# EAGLE board ATmga8_testBoard_v5_doubled_for_print (EAGLE 6.5.0), part 1 of 4
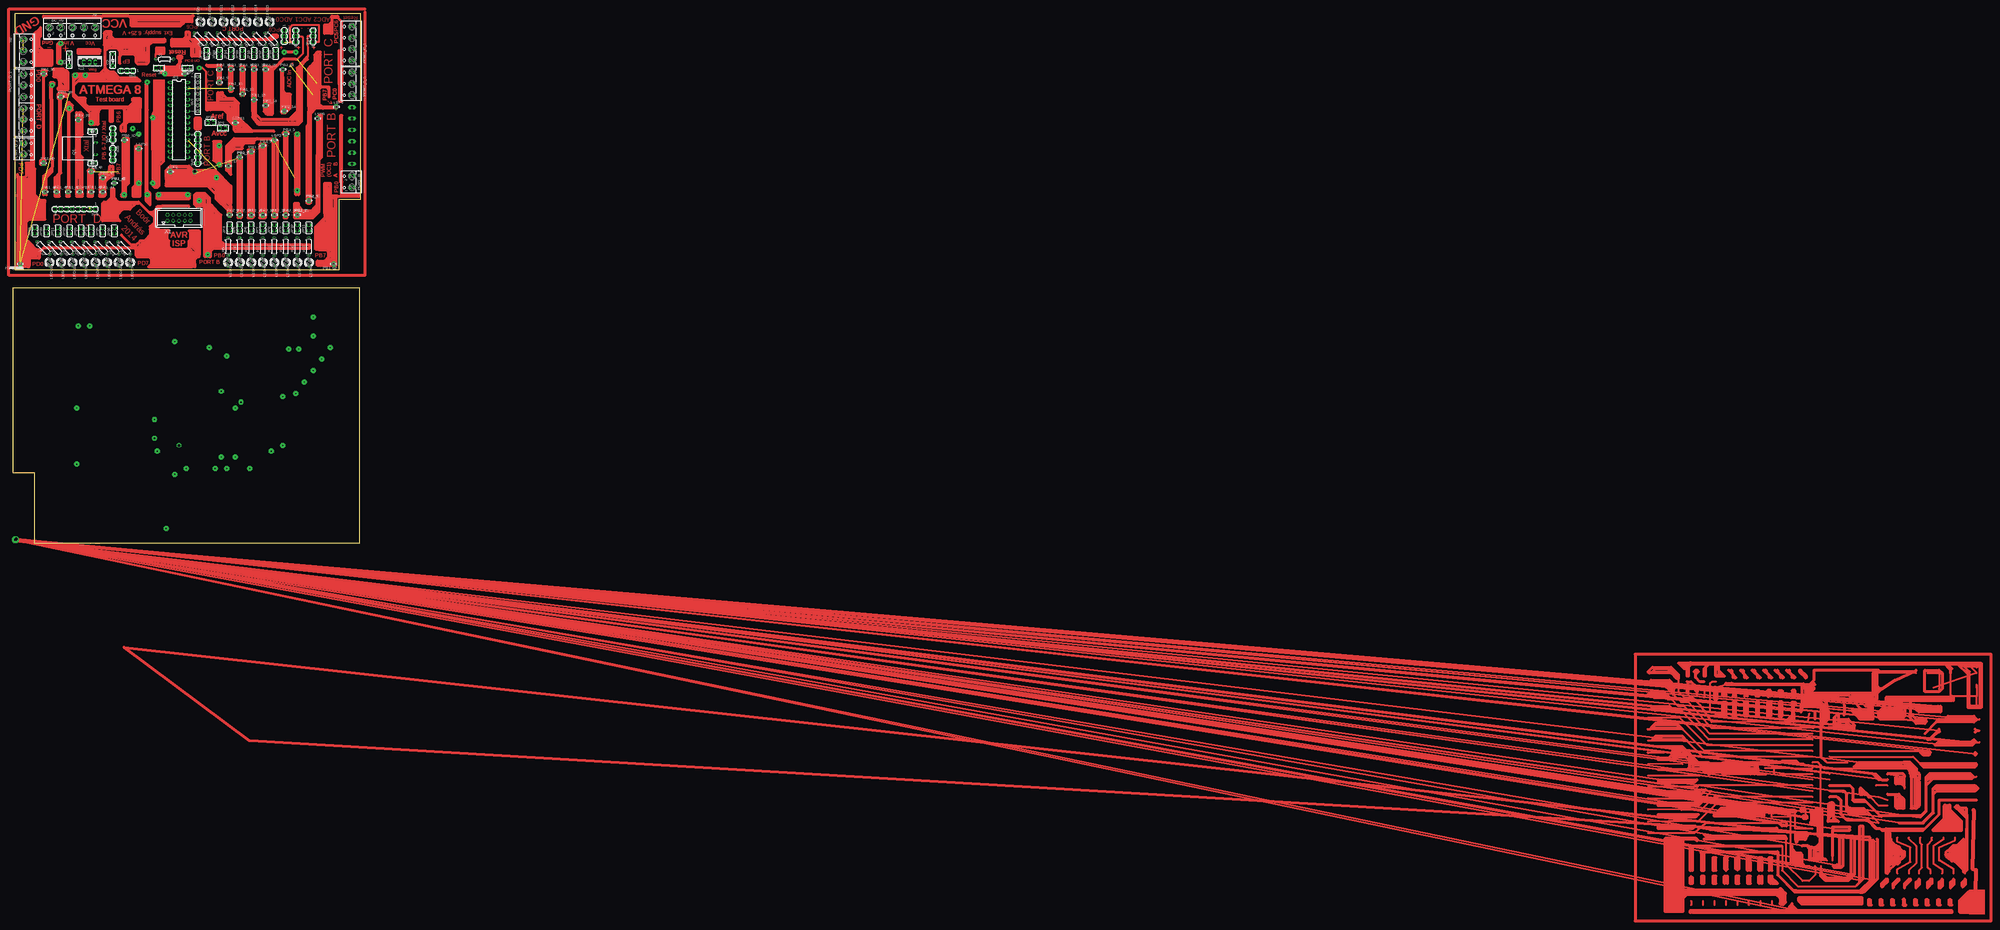
[diagram p0: board, top side]
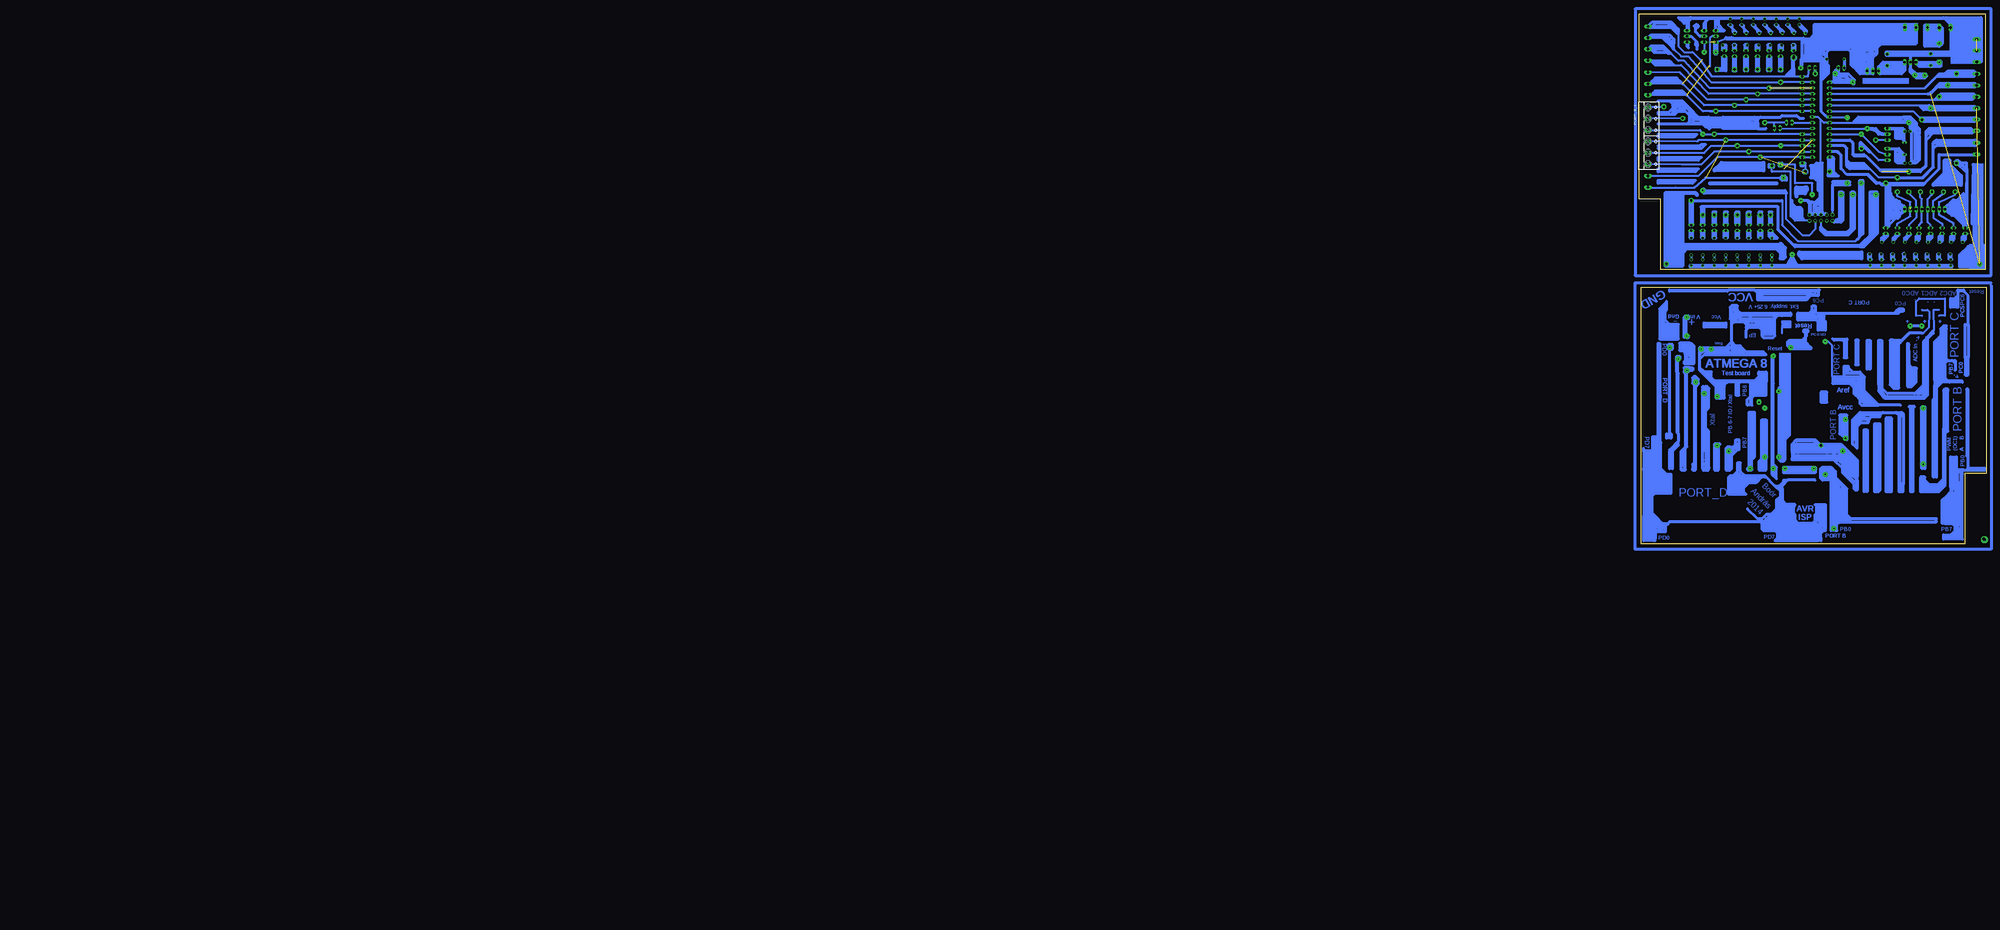
[diagram p1: board, bottom side, seen from below]

Size 153.03 x 233.35 mm. Coordinates in mm from the lower left corner, seen from the top.
Outline: 0.64,120.65 143.51,120.65 143.51,151.77 153.03,151.77 153.01,233.35 0.64,233.35 0.64,120.65
Outline: 152.4,0 9.53,0 9.53,31.12 0,31.12 0.02,112.7 152.4,112.7 152.4,0
Copper layers (1*16): Top 0.035mm / dielectric 1.5mm / Bottom 0.035mm
Design rules "default": minimum track width 10mil, minimum drill 24mil, track to track 8mil, track to pad 8mil, pad to pad 8mil, via to via 8mil, smd to smd 8mil, copper to edge 40mil, drill to drill 8mil, minimum pad ring 10mil, minimum via ring 8mil, stop-mask expansion 4mil, vias tented up to drill 0mil, thermal gap 10mil

## Footprints (pad centres in the part's own frame; a part is rotated, then mirrored left to right if it is on the bottom)
C5B2.5 = drill 0.813 pad 1.6 octagon: 1 -2.54,0; 2 2.54,0
C025-024X044 = drill 0.813 octagon: 1 -1.27,0; 2 1.27,0
W237-102 = drill 1.194 long: 1 -2.5,-1.27; 2 2.5,-1.27
DIL28-3 = drill 0.813 long: 1 -16.51,-3.81; 2 -13.97,-3.81; 3 -11.43,-3.81; 4 -8.89,-3.81; 5 -6.35,-3.81; 6 -3.81,-3.81; 7 -1.27,-3.81; 8 1.27,-3.81; 9 3.81,-3.81; 10 6.35,-3.81; 11 8.89,-3.81; 12 11.43,-3.81; 13 13.97,-3.81; 14 16.51,-3.81; 15 16.51,3.81; 16 13.97,3.81; 17 11.43,3.81; 18 8.89,3.81; 19 6.35,3.81; 20 3.81,3.81; 21 1.27,3.81; 22 -1.27,3.81; 23 -3.81,3.81; 24 -6.35,3.81; 25 -8.89,3.81; 26 -11.43,3.81; 27 -13.97,3.81; 28 -16.51,3.81
78XXS = drill 1.016 long: GND 0,-2.54; IN -2.54,-2.54; OUT 2.54,-2.54
JP1 = drill 0.914 long: 1 0,-1.27; 2 0,1.27
LED3MM = drill 0.813 octagon: A -1.27,0; K 1.27,0
LSP10 = drill 1.016 pad 2.159 octagon: MP 0,0
W237-6 = drill 1.194 long: 1 -12.5,-1.27; 2 -7.5,-1.27; 3 -2.5,-1.27; 4 2.5,-1.27; 5 7.5,-1.27; 6 12.5,-1.27
W237-4 = drill 1.194 long: 1 -7.5,-1.27; 2 -2.5,-1.27; 3 2.5,-1.27; 4 7.5,-1.27
W237-103 = drill 1.194 long: 1 -5,-1.29; 2 0,-1.29; 3 5,-1.29
Q = drill 0.61 long: 1 -2.54,-7.62; 2 2.54,-7.62
0204/7 = drill 0.813 octagon: 1 -3.81,0; 2 3.81,0
0207/7 = drill 0.813 octagon: 1 -3.81,0; 2 3.81,0
MA03-1 = drill 1.016 long: 1 -2.54,0; 2 0,0; 3 2.54,0
FE07 = drill 0.813 long: 1 -7.62,0; 2 -5.08,0; 3 -2.54,0; 4 0,0; 5 2.54,0; 6 5.08,0; 7 7.62,0
MA06-1 = drill 1.016 long: 1 -6.35,0; 2 -3.81,0; 3 -1.27,0; 4 1.27,0; 5 3.81,0; 6 6.35,0
MA08-1 = drill 1.016 long: 1 -8.89,0; 2 -6.35,0; 3 -3.81,0; 4 -1.27,0; 5 1.27,0; 6 3.81,0; 7 6.35,0; 8 8.89,0
057-010-1 = drill 1 octagon: 1 -5.08,-1.27; 2 -5.08,1.27; 3 -2.54,-1.27; 4 -2.54,1.27; 5 0,-1.27; 6 0,1.27; 7 2.54,-1.27; 8 2.54,1.27; 9 5.08,-1.27; 10 5.08,1.27

## Placement (x,y rotation side)
C1  0.33_uF  [C5B2.5]  24.69,213.22 90 top
C2  0.33_uF  [C5B2.5]  43.81,213.11 90 top
C3  [C025-024X044]  34.92,181.61 180 top
C4  [C025-024X044]  34.92,167.64 180 top
DC_IN  [W237-102]  18.42,226.06 180 top
IC1  ATmega8  [DIL28-3]  73.03,186.69 270 top
IC2  7805_CV  [78XXS]  33.66,214.63 0 top
JP1  PC0_Reset  [JP1]  64.14,209.55 90 top
JP2  PC0_IO  [JP1]  76.84,209.55 90 top
JP3  [JP1]  92.33,183.01 270 top
JP4  [JP1]  95.25,139.06 0 top
JP5  [JP1]  99.7,139.06 0 top
JP6  [JP1]  104.78,139.06 0 top
JP7  [JP1]  109.86,139.06 0 top
JP8  [JP1]  114.94,139.06 0 top
JP9  [JP1]  120.02,139.06 0 top
JP10  [JP1]  125.09,139.06 0 top
JP11  [JP1]  130.17,139.06 0 top
JP12  [JP1]  85.09,215.9 0 top
JP13  [JP1]  90.81,215.9 0 top
JP14  [JP1]  95.89,215.9 0 top
JP15  [JP1]  100.97,215.9 0 top
JP16  [JP1]  106.05,215.9 0 top
JP17  [JP1]  111.12,215.9 0 top
JP18  [JP1]  115.57,215.9 0 top
JP19  [JP1]  9.53,137.8 0 top
JP20  [JP1]  14.61,137.8 0 top
JP21  [JP1]  19.69,137.8 0 top
JP22  [JP1]  24.77,137.8 0 top
JP23  [JP1]  29.85,137.8 0 top
JP24  [JP1]  34.29,137.8 0 top
JP25  [JP1]  39.37,137.8 0 top
JP26  [JP1]  44.45,137.8 0 top
JP27  VREF_VCC  [JP1]  87,185.42 270 top
LED1  [LED3MM]  94.62,123.83 270 top
LED2  [LED3MM]  99.7,123.83 270 top
LED3  [LED3MM]  104.78,123.83 270 top
LED4  [LED3MM]  109.86,123.83 270 top
LED5  [LED3MM]  114.94,123.83 270 top
LED6  [LED3MM]  120.02,123.83 270 top
LED7  [LED3MM]  125.09,123.83 270 top
LED8  [LED3MM]  130.17,123.83 270 top
LED9  [LED3MM]  82.55,229.87 90 top
LED10  [LED3MM]  87.63,229.87 90 top
LED11  [LED3MM]  92.71,229.87 90 top
LED12  [LED3MM]  97.79,229.87 90 top
LED13  [LED3MM]  102.87,229.87 90 top
LED14  [LED3MM]  107.95,229.87 90 top
LED15  [LED3MM]  113.03,229.87 90 top
LED16  [LED3MM]  15.88,123.83 270 top
LED17  [LED3MM]  20.96,123.83 270 top
LED18  [LED3MM]  26.04,123.83 270 top
LED19  [LED3MM]  31.12,123.83 270 top
LED20  [LED3MM]  36.2,123.83 270 top
LED21  [LED3MM]  41.27,123.83 270 top
LED22  [LED3MM]  46.35,123.83 270 top
LED23  [LED3MM]  51.43,123.83 270 top
LSP1  LSP10  [LSP10]  69.22,163.83 0 top
LSP2  LSP10  [LSP10]  114.94,177.8 0 top
LSP3  LSP10  [LSP10]  3.17,123.19 180 top
LSP4  LSP10  [LSP10]  3.17,123.19 180 top
LSP5  LSP10  [LSP10]  142.24,192.41 0 top
LSP6  LSP10  [LSP10]  133.98,187.32 0 top
LSP7  LSP10  [LSP10]  3.17,123.19 180 top
LSP8  LSP10  [LSP10]  3.17,123.19 180 top
LSP9  LSP10  [LSP10]  75.57,207.01 0 top
LSP10  LSP10  [LSP10]  55.24,173.99 0 top
LSP11  LSP10  [LSP10]  97.79,185.42 0 top
LSP12  LSP10  [LSP10]  3.17,123.19 180 top
LSP13  LSP10  [LSP10]  3.17,123.19 180 top
LSP14  LSP10  [LSP10]  3.17,123.19 180 top
LSP15  LSP10  [LSP10]  3.17,123.19 180 top
LSP16  LSP10  [LSP10]  29.21,154.94 0 top
LSP17  LSP10  [LSP10]  94.62,166.37 0 top
LSP18  LSP10  [LSP10]  3.17,123.19 180 top
LSP19  LSP10  [LSP10]  3.17,123.19 180 top
PB1_1  LSP10  [LSP10]  130.17,151.13 0 top
PB1_2  LSP10  [LSP10]  125.09,144.78 0 top
PB1_3  LSP10  [LSP10]  120.02,180.34 0 top
PB1_5  LSP10  [LSP10]  109.86,175.26 0 top
PB1_6  LSP10  [LSP10]  104.78,172.72 0 top
PB1_7  LSP10  [LSP10]  99.7,170.18 0 top
PB1_8  LSP10  [LSP10]  99.7,170.18 0 top
PB1_9  LSP10  [LSP10]  90.81,203.2 0 top
PB1_10  LSP10  [LSP10]  95.89,200.66 0 top
PB1_11  LSP10  [LSP10]  100.97,198.12 0 top
PB1_12  LSP10  [LSP10]  106.05,195.58 0 top
PB1_13  LSP10  [LSP10]  111.12,193.04 0 top
PB1_14  LSP10  [LSP10]  119.38,190.5 0 top
PB1_15  LSP10  [LSP10]  85.09,214 0 top
PB1_16  LSP10  [LSP10]  90.81,208.92 0 top
PB1_17  LSP10  [LSP10]  95.89,208.92 0 top
PB1_18  LSP10  [LSP10]  100.97,208.92 0 top
PB1_19  LSP10  [LSP10]  106.05,208.92 0 top
PB1_20  LSP10  [LSP10]  111.12,208.92 0 top
PB1_21  LSP10  [LSP10]  118.75,208.92 0 top
PB1_22  LSP10  [LSP10]  3.17,123.19 180 top
PB1_23  LSP10  [LSP10]  3.17,123.19 180 top
PB1_24  LSP10  [LSP10]  3.17,123.19 180 top
PB1_25  LSP10  [LSP10]  3.17,123.19 180 top
PB1_26  LSP10  [LSP10]  3.17,123.19 180 top
PB1_27  LSP10  [LSP10]  3.17,123.19 180 top
PB1_28  LSP10  [LSP10]  3.17,123.19 180 top
PB1_29  LSP10  [LSP10]  3.17,123.19 180 top
PB1_30  LSP10  [LSP10]  3.17,123.19 180 top
PB1_31  LSP10  [LSP10]  3.17,123.19 180 top
PB1_32  LSP10  [LSP10]  3.17,123.19 180 top
PB1_33  LSP10  [LSP10]  3.17,123.19 180 top
PB1_34  LSP10  [LSP10]  3.17,123.19 180 top
PB1_35  LSP10  [LSP10]  3.17,123.19 180 top
PB1_36  LSP10  [LSP10]  13.33,207.01 0 top
PB1_37  LSP10  [LSP10]  3.17,123.19 180 top
PB1_38  LSP10  [LSP10]  20.96,196.85 0 top
PB1_39  LSP10  [LSP10]  28.58,186.69 0 top
PB1_40  LSP10  [LSP10]  34.29,163.83 0 top
PB1_41  LSP10  [LSP10]  39.37,161.29 0 top
PB1_42  LSP10  [LSP10]  44.45,158.75 0 top
PB1_43  LSP10  [LSP10]  44.45,158.75 0 top
PB1_44  LSP10  [LSP10]  39.37,154.94 0 top
PB1_45  LSP10  [LSP10]  34.29,154.94 0 top
PB1_46  LSP10  [LSP10]  24.13,154.94 0 top
PB1_47  LSP10  [LSP10]  19.05,154.94 0 top
PB1_48  LSP10  [LSP10]  13.97,154.94 0 top
PB1_49  LSP10  [LSP10]  13.33,167.64 0 top
PB1_50  LSP10  [LSP10]  3.17,123.19 180 top
PB1_51  LSP10  [LSP10]  3.17,123.19 180 top
PB1_52  LSP10  [LSP10]  3.17,123.19 180 top
PB1_53  LSP10  [LSP10]  3.17,123.19 180 top
PB1_54  LSP10  [LSP10]  3.17,123.19 180 top
PB1_55  LSP10  [LSP10]  3.17,123.19 180 top
PB1_56  LSP10  [LSP10]  3.17,123.19 180 top
PB1_57  LSP10  [LSP10]  3.17,123.19 180 top
PB1_58  LSP10  [LSP10]  3.17,123.19 180 top
PB1_59  LSP10  [LSP10]  3.17,123.19 180 top
PB1_60  LSP10  [LSP10]  3.17,123.19 180 top
PB1_61  LSP10  [LSP10]  3.17,123.19 180 top
PB1_62  LSP10  [LSP10]  141.1,123.19 180 top
PB2_1  LSP10  [LSP10]  3.17,123.19 180 top
PB2_2  LSP10  [LSP10]  3.17,123.19 180 top
PB2_3  LSP10  [LSP10]  3.17,123.19 180 top
PB2_4  LSP10  [LSP10]  3.17,123.19 180 top
PB2_5  LSP10  [LSP10]  3.17,123.19 180 top
PB2_6  LSP10  [LSP10]  3.17,123.19 180 top
PB2_7  LSP10  [LSP10]  3.17,123.19 180 top
PB2_8  LSP10  [LSP10]  3.17,123.19 180 top
PB2_9  LSP10  [LSP10]  95.25,144.78 0 top
PB2_10  LSP10  [LSP10]  99.7,144.78 0 top
PB2_11  LSP10  [LSP10]  104.78,144.78 0 top
PB2_12  LSP10  [LSP10]  109.86,144.78 0 top
PB2_13  LSP10  [LSP10]  114.94,144.78 0 top
PB2_14  LSP10  [LSP10]  120.02,144.78 0 top
PB2_15  LSP10  [LSP10]  125.09,144.78 0 top
PB2_16  LSP10  [LSP10]  130.17,151.13 0 top
PB2_17  LSP10  [LSP10]  3.17,123.19 180 top
PB2_18  LSP10  [LSP10]  3.17,123.19 180 top
PB2_19  LSP10  [LSP10]  3.17,123.19 180 top
PB2_20  LSP10  [LSP10]  3.17,123.19 180 top
PB2_21  LSP10  [LSP10]  3.17,123.19 180 top
PB2_22  LSP10  [LSP10]  3.17,123.19 180 top
PB2_23  LSP10  [LSP10]  3.17,123.19 180 top
PB6_IO_1  LSP10  [LSP10]  48.89,177.8 0 top
PB6_IO_2  LSP10  [LSP10]  3.17,123.19 180 top
PORT_B_1  [W237-6]  147.95,179.71 270 bottom
PORT_B_2  [W237-102]  147.95,159.38 90 top
PORT_C_1  [W237-4]  147.95,220.34 90 top
PORT_C_2  [W237-103]  147.95,202.56 90 top
PORT_D_1  PORT_D  [W237-6]  5.71,194.31 270 top
PORT_D_2  [W237-102]  5.74,173.91 270 top
Q1  [Q]  28.58,173.99 90 top
R1  10k  [0204/7]  66.68,213.36 0 top
R2  470R  [0207/7]  82.55,222.25 135 top
R3  470R  [0207/7]  87.63,222.25 135 top
R4  470R  [0207/7]  92.71,222.25 135 top
R5  470R  [0207/7]  97.79,222.25 135 top
R6  470R  [0207/7]  102.87,222.25 135 top
R7  470R  [0207/7]  108.59,222.25 135 top
R8  470R  [0207/7]  113.67,222.25 135 top
R9  470R  [0207/7]  94.62,130.81 90 top
R10  470R  [0207/7]  99.7,130.81 90 top
R11  470R  [0207/7]  104.78,130.81 90 top
R12  470R  [0207/7]  109.86,130.81 90 top
R13  470R  [0207/7]  114.94,130.81 90 top
R14  470R  [0207/7]  120.02,130.81 90 top
R15  470R  [0207/7]  130.17,130.81 90 top
R16  470R  [0207/7]  125.09,130.81 90 top
R17  470R  [0207/7]  13.33,130.18 135 top
R18  470R  [0207/7]  18.42,130.18 135 top
R19  470R  [0207/7]  23.5,130.18 135 top
R20  470R  [0207/7]  28.58,130.18 135 top
R21  470R  [0207/7]  33.66,130.18 135 top
R22  470R  [0207/7]  38.73,130.18 135 top
R23  470R  [0207/7]  48.89,130.18 135 top
R24  470R  [0207/7]  43.81,130.18 135 top
SV1  Power  [MA03-1]  50.16,208.28 180 top
SV2  Pot 1  [MA03-1]  119.38,223.52 270 top
SV3  Pot 2  [MA03-1]  124.46,223.52 90 top
SV4  Pot 3  [MA03-1]  132.08,223.52 90 top
SV5  Xtal/PB6  [MA03-1]  43.81,180.34 90 top
SV6  Xtal/PB7  [MA03-1]  43.81,171.45 270 top
SV7  [FE07]  81.28,198.12 90 top
SV8  [MA06-1]  81.28,173.99 90 top
SV9  [MA08-1]  27.31,147.32 180 top
X1  057-010-1  [057-010-1]  73.03,143.51 0 top
X8  VCC_out  [W237-103]  31.12,226.06 180 top
X9  GND_out  [W237-103]  5.71,217.17 270 top

## Library data of the parts
C1 C2 = capacitor-wima
C3 C4 R2-R24 = rcl
DC_IN PORT_B_2 PORT_D_2 = con-wago-500; MPN: 237-102; OC_FARNELL: unknown; OC_NEWARK: 70K9898
IC1 = ic-package
IC2 = v-reg
JP1-JP27 = jumper
LED1-LED23 = led
LSP1-LSP19 PB1_1-PB1_3 PB1_5-PB1_62 PB2_1-PB2_23 PB6_IO_1 PB6_IO_2 = solpad
PORT_B_1 PORT_C_1 PORT_D_1 = con-wago-500; OC_FARNELL: unknown; OC_NEWARK: unknown
PORT_C_2 X8 X9 = con-wago-500; MPN: 237-103; OC_FARNELL: unknown; OC_NEWARK: 18M7116
Q1 = special
R1 = resistor
SV1-SV6 SV8 SV9 = con-lstb; OC_FARNELL: unknown; OC_NEWARK: unknown
SV7 = con-lsta; OC_FARNELL: unknown; OC_NEWARK: unknown
X1 = con-panduit; OC_FARNELL: unknown; OC_NEWARK: unknown

## Nets
AVCC: IC1.19 PB1_3.MP PORT_B_1.3 SV8.6 X1.7
N$1: C2.1 IC2.OUT SV1.3
N$2: C1.1 DC_IN.1 IC2.IN X8.3
N$3: IC1.1 JP1.1 JP2.2 LSP9.MP X1.5
N$5: IC1.14 LSP1.MP
N$6: LSP3.MP LSP4.MP
N$8: PB1_22.MP PB2_1.MP
N$9: PB1_23.MP PB2_2.MP
N$10: PB1_24.MP PB2_3.MP
N$11: LSP13.MP PB2_4.MP
N$12: LSP8.MP PB6_IO_2.MP
N$13: IC1.20 JP3.1
N$14: LSP7.MP LSP12.MP
N$15: IC1.23 PB1_14.MP PORT_C_2.1 SV2.2
N$16: IC1.24 PB1_13.MP PORT_C_2.2 SV3.2
N$18: IC1.26 PB1_11.MP PORT_C_1.1
N$19: IC1.27 PB1_10.MP PORT_C_1.2
N$20: IC1.28 PB1_9.MP PORT_C_1.3
N$21: JP2.1 PORT_C_1.4
N$22: JP1.2 R1.1
N$23: PB1_25.MP PB2_5.MP
N$24: PB1_26.MP PB2_6.MP
N$25: IC1.10 SV6.2
N$26: IC1.9 SV5.2
N$27: IC1.2 PB1_36.MP PORT_D_1.1
N$28: IC1.3 PB1_37.MP PORT_D_1.2
N$29: IC1.4 PB1_38.MP PORT_D_1.3
N$30: IC1.5 LSP15.MP PORT_D_1.4
N$31: IC1.6 PB1_39.MP PORT_D_1.5
N$32: PB1_28.MP PB2_8.MP
N$33: C4.1 Q1.1 SV6.1
N$34: C3.1 Q1.2 SV5.3
N$35: LSP10.MP SV6.3
N$36: PB6_IO_1.MP SV5.1
N$37: IC1.11 PB1_40.MP PORT_D_1.6
N$38: IC1.12 PB1_41.MP PORT_D_2.1
N$39: IC1.13 PB1_42.MP PORT_D_2.2
N$40: IC1.18 LSP17.MP PORT_B_1.4 SV8.5 X1.9
N$41: IC1.17 PB1_5.MP PORT_B_1.5 SV8.4 X1.1
N$42: IC1.16 PB1_6.MP PORT_B_1.6 SV8.3
N$43: IC1.15 PB1_7.MP PORT_B_2.1 SV8.2
N$44: LSP2.MP PB1_8.MP PORT_B_2.2 SV8.1
N$45: PB1_27.MP PB2_7.MP
N$46: IC1.21 JP27.1
N$47: JP4.1 R9.2
N$48: JP5.1 R10.2
N$49: JP6.1 R11.2
N$50: JP7.1 R12.2
N$51: JP13.1 PB1_16.MP
N$52: JP9.1 R14.2
N$53: JP11.1 R15.2
N$54: JP10.1 R16.2
N$55: LED9.A R2.2
N$56: JP14.1 PB1_17.MP
N$58: JP15.1 PB1_18.MP
N$59: JP17.2 R7.1
N$60: JP17.1 PB1_20.MP
N$61: JP18.1 PB1_21.MP
N$62: JP12.2 R2.1
N$65: JP14.2 R4.1
N$66: JP16.2 R6.1
N$67: JP13.2 R3.1
N$68: JP18.2 R8.1
N$69: LED1.A R9.1
N$70: LED2.A R10.1
N$71: LED3.A R11.1
N$72: LED4.A R12.1
N$73: LED5.A R13.1
N$74: LED7.A R16.1
N$75: LED6.A R14.1
N$76: LED8.A R15.1
N$78: LED10.A R3.2
N$79: LED11.A R4.2
N$80: LED12.A R5.2
N$81: LED13.A R6.2
N$82: LED14.A R7.2
N$83: LED15.A R8.2
N$84: JP4.2 PB2_9.MP
N$85: JP5.2 PB2_10.MP
N$87: JP7.2 PB2_12.MP
N$88: JP8.2 PB2_13.MP
N$89: JP9.2 PB2_14.MP
N$90: JP10.2 PB2_15.MP
N$92: PB1_35.MP PB1_50.MP
N$93: PB1_34.MP PB1_51.MP
N$94: PB1_33.MP PB1_52.MP
N$95: LSP18.MP PB1_32.MP
N$96: LSP14.MP PB1_53.MP
N$97: PB1_31.MP PB1_54.MP
N$98: PB1_30.MP PB1_55.MP
N$99: PB1_29.MP PB1_56.MP
N$100: JP19.1 R17.2
N$101: JP20.1 R18.2
N$102: JP21.1 R19.2
N$104: JP23.1 R21.2
N$105: JP24.1 R22.2
N$107: JP25.1 R24.2
N$108: LED16.A R17.1
N$109: LED17.A R18.1
N$110: LED18.A R19.1
N$111: LED19.A R20.1
N$112: LED20.A R21.1
N$113: LED22.A R24.1
N$114: LED21.A R22.1
N$115: LED23.A R23.1
N$117: JP20.2 PB1_48.MP SV9.7
N$118: JP21.2 PB1_47.MP SV9.6
N$119: JP22.2 PB1_46.MP SV9.5
N$121: JP24.2 PB1_45.MP SV9.3
N$122: JP25.2 PB1_44.MP SV9.2
N$123: JP26.2 PB1_43.MP SV9.1
N$124: PB1_57.MP PB2_17.MP
N$125: PB1_58.MP PB2_18.MP
N$126: LSP19.MP PB2_19.MP
N$127: PB1_59.MP PB2_20.MP
N$128: PB1_60.MP PB2_21.MP
N$129: PB1_61.MP PB2_22.MP
N$130: PB1_62.MP PB2_23.MP
N$137: X9.1 X9.2 X9.3
N$139: C1.2 C2.2 C3.2 C4.2 DC_IN.2 IC1.8 IC1.22 IC2.GND LED1.K LED2.K LED3.K LED4.K LED5.K LED6.K LED7.K LED8.K LED9.K LED10.K LED11.K LED12.K LED13.K LED14.K LED15.K LED16.K LED17.K LED18.K LED19.K LED20.K LED21.K LED22.K LED23.K SV2.1 SV3.3 SV4.3 X1.4 X1.6 X1.8 X1.10
N$152: SV1.1 X1.2
N$161: JP23.2 LSP16.MP SV9.4
N$163: IC1.25 PB1_12.MP PORT_C_2.3 SV4.2
N$168: JP8.1 R13.2
N$173: JP16.1 PB1_19.MP
N$174: JP11.2 PB2_16.MP
N$177: JP15.2 R5.1
N$178: JP12.1 PB1_15.MP
N$186: JP6.2 PB2_11.MP
N$187: LSP6.MP PB1_2.MP PORT_B_1.2
N$188: JP26.1 R23.2
N$189: JP22.1 R20.2
N$209: JP19.2 PB1_49.MP SV9.8
N$216: LSP5.MP PB1_1.MP PORT_B_1.1
VCC: IC1.7 JP3.2 JP27.2 LSP11.MP R1.2 SV1.2 SV2.3 SV3.1 SV4.1 X8.1 X8.2

## Tracks (layer width: path | path; a pad name or v marks a point on that pad's centre or on a via)
AVCC  (via drill 0.5 pad 2.18)
  Top 0.813: v125.09,155.57 v125.09,180.34
  Bottom 0.813: PORT_B_1.3 126.41,182.21 v125.09,180.34 PB1_3.MP SV8.6 IC1.19 | X1.7 75.57,138.43 78.23,135.76 81.15,135.76 88.27,142.88 88.27,154.31 | 88.9,155.57 v125.09,155.57
  Bottom 1.422: 124.46,156.21 123.83,155.57 88.9,155.57 88.27,154.31 124.46,154.31 125.09,154.94 125.09,156.21 124.46,156.21
AVCC1  (via drill 0.5 pad 2.18)
  Top 0.813: 720.09,-102.28 742.91,-102.28 v0.64,1.27 792.48,-104.14 | 793.75,-142.24 793.75,-146.05 791.08,-148.72 788.16,-148.72 781.05,-141.6 781.05,-130.17 | 749.3,-128.91 v1.27,1.91
  Top 1.422: 749.3,-128.91 745.49,-128.91 744.86,-128.27 749.3,-128.91 | 749.3,-128.91 780.41,-128.91 781.05,-130.17 749.3,-130.17 | 744.86,-130.17 749.3,-130.17 | 749.3,-130.17 749.3,-128.91
AVCC2  (via drill 0.5 pad 2.18)
  Bottom 0.813: v27.94,34.93 v27.94,59.69
N$1
  Bottom 0.813: IC2.OUT C2.1 43.81,208.28 SV1.3
  Bottom 1.422: IC2.OUT 36.2,208.28 37.46,207.01 46.99,207.01 47.62,207.65 47.62,210.19 45.72,212.09 IC2.OUT | IC2.OUT 36.2,209.55 37.46,208.28 46.35,208.28 46.99,207.65 46.99,209.55 45.09,211.46 38.1,211.46 37.46,210.82 | 37.46,210.82 37.46,211.46 | 37.46,210.82 37.46,209.55 46.35,209.55 45.09,210.82 38.1,210.82
N$2  (via drill 0.5 pad 2.18)  (1 unrouted)
  Top 0.813: v20.96,212.09 20.96,219.71 20.96,220.34
  Top 1.422: 21.59,212.09 20.32,213.36 | 20.32,213.36 20.32,220.34 | 20.32,213.36 20.32,212.09 20.96,211.46 | 20.96,211.46 21.59,211.46 | 20.96,211.46 19.69,211.46 19.69,220.34 20.32,220.98 21.59,220.98 21.59,219.71 20.96,219.71
  Bottom 0.813: IC2.IN C1.1 v20.96,212.09 | 20.96,220.34 21,220.38 DC_IN.1 20.92,227.35 X8.3
  Bottom 1.422: 20.32,212.09 20.32,211.46 | 20.32,211.46 20.32,210.19 29.85,210.19 31.12,211.46 IC2.IN 21.59,212.09 | 21.59,212.09 20.32,212.09 | 20.32,212.09 20.96,211.46 | 20.96,211.46 21.59,210.82 29.21,210.82 29.85,211.46 20.96,211.46 | 20.96,211.46 v20.96,212.09 | v20.96,212.09 21.59,212.73 | 21.59,212.73 20.32,212.73 20.32,212.09 | 20.32,211.46 v20.96,212.09 | 21.59,212.73 21.59,212.09
N$3  (via drill 0.5 pad 2.18)
  Top 0.813: JP1.1 65.41,208.28 66.68,207.01 67.31,207.01 LSP9.MP | 59.05,191.13 59.05,155.57 v59.05,153.67
  Top 1.27: 73.03,211.46 71.12,209.55 | 72.39,210.82 73.66,212.09 73.66,212.73 | 73.66,213.36 74.3,214 74.3,214.63 72.39,214.63 72.39,214 73.66,212.73 | 73.66,212.73 73.66,213.36 | 73.66,213.36 73.03,214 73.03,209.55 73.03,208.92
  Top 1.422: 59.05,191.13 v59.05,203.2 58.42,202.56 58.42,154.31 v59.05,153.67 | JP1.1 66.04,210.19 72.39,210.19 73.03,209.55 LSP9.MP 75.57,206.38 66.68,206.38 65.41,207.65 JP1.1 | JP1.1 71.12,209.55 71.76,209.55 73.66,207.65 67.95,207.65 67.31,208.28 | 67.31,208.28 66.68,208.92 66.04,208.28 67.31,207.01 69.85,207.01 71.76,208.92 67.95,208.92 67.31,208.28 | 58.42,153.67 58.42,151.13 60.32,149.22 60.32,154.31 59.05,155.57 59.05,151.13 | 59.05,151.13 59.05,150.5 59.69,149.86 59.69,150.5 59.05,151.13
  Bottom 0.813: IC1.1 67.95,203.2 | 67.95,203.2 67.31,203.84 66.68,204.47 66.68,207.01 65.41,207.01 JP1.1 | LSP9.MP JP2.2 | X1.5 73.03,139.7 73.03,138.43 70.48,135.89 61.59,135.89 59.05,138.43 v59.05,153.67 | v59.05,203.2 67.31,203.2 67.95,203.2
  Bottom 1.422: v59.05,203.2 59.05,203.84 | 59.69,203.84 66.68,203.84 66.68,208.28 JP1.1 | JP1.1 65.41,204.47 66.04,205.11 66.04,204.47 67.31,203.2 | 67.31,203.2 69.85,203.2 | 67.31,203.2 59.69,203.2 59.05,202.56 58.42,202.56 58.42,203.84 | 58.42,203.84 59.05,203.84 | JP1.1 67.31,207.65 67.31,203.84 | 64.77,207.01 60.96,207.01 58.42,204.47 58.42,203.84 | 59.05,203.84 59.69,203.84 | 59.69,203.84 61.59,205.74 64.14,205.74 64.77,206.38 64.77,205.11 64.14,204.47 62.23,204.47 61.59,205.11 | LSP9.MP 75.57,210.19 | 58.42,154.94 58.42,138.43 60.96,135.89 61.59,135.89 71.12,135.89 73.03,137.8 73.03,139.7 70.48,137.16 61.59,137.16 59.69,139.06 59.69,154.94 58.42,154.94
N$4
  Top 1.422: 111.12,175.9 108.59,175.9 108.59,143.51 111.12,143.51 111.12,175.9 | 111.12,175.9 110.49,174.62 110.49,143.51 109.22,143.51 109.22,175.26
N$5  (via drill 1.3)
  Top 0.813: LSP1.MP v80.01,163.83 88.27,163.83 89.54,162.56 89.54,158.12 | 89.54,153.67 89.54,152.4 93.34,152.4 95.25,152.4 95.25,147.96 95.25,145.42
  Top 1.422: 95.25,147.96 94.62,147.96 90.81,151.77 93.34,151.77 93.34,151.13 95.89,148.59 | 95.89,144.15 95.25,144.15 94.62,144.78 94.62,146.69 89.54,151.77 89.54,153.67 | 89.54,153.67 89.54,158.12 | 89.54,158.12 89.54,160.02 88.9,160.66 85.09,160.66 | 82.55,160.66 69.85,160.66 67.95,162.56 67.95,163.83 68.58,164.47 | 68.58,164.47 78.11,164.47 | 79.38,164.47 88.9,164.47 95.89,157.48 95.89,149.86 | 95.89,148.59 95.89,144.78 | 95.89,148.59 95.89,149.86 | 95.89,149.86 93.34,152.4 | 90.17,155.57 85.09,160.66 | 85.09,160.66 82.55,160.66 | 82.55,160.66 81.28,161.93 67.95,161.93 67.31,161.29 | 67.31,161.29 67.31,160.66 | 67.31,160.66 67.31,158.75 67.31,158.12 | 67.31,158.12 85.09,158.12 | 86.36,158.12 89.54,158.12 | 89.54,158.12 88.27,159.38 | 88.27,159.38 88.27,160.02 87.63,160.66 67.31,160.66 | 67.31,160.66 67.95,160.02 67.95,158.75 68.58,159.38 88.27,159.38 | 67.31,161.29 67.31,164.47 | 67.31,164.47 68.58,164.47 | 67.31,164.47 69.22,166.37 77.47,166.37 79.38,164.47 | 79.38,164.47 78.11,164.47 | 78.11,164.47 76.84,165.74 69.22,165.74 | 89.54,153.67 85.73,157.48 | 85.73,157.48 85.09,158.12 | 85.09,158.12 86.36,158.12 | 86.36,158.12 87,157.48 87.63,157.48 90.17,154.94 | 85.73,157.48 67.31,157.48 67.31,158.12
  Bottom 0.813: IC1.14 LSP1.MP
  Bottom 1.422: LSP1.MP 68.58,164.47 68.58,169.55 69.85,169.55 69.85,162.56 | 69.85,162.56 67.95,162.56 67.31,163.19 67.31,163.83 | 67.31,163.83 67.31,169.55 67.95,170.18 68.58,170.18 | 67.31,163.83 65.41,161.93 69.85,161.93 69.85,162.56 | v80.01,163.83 79.38,163.83 80.01,163.19 | 80.01,163.19 80.65,163.19 80.65,164.47 79.38,164.47 79.38,163.19 80.01,163.19
N$6  (1 unrouted)
N$7
  Top 1.422: 42.54,191.13 42.54,186.06 43.81,186.06 43.81,191.13
N$8  (1 unrouted)
N$9  (1 unrouted)
N$10  (1 unrouted)
N$11  (1 unrouted)
N$12  (1 unrouted)
N$13
  Bottom 0.813: JP3.1 IC1.20
N$14  (1 unrouted)
N$15  (2 unrouted)
  Bottom 0.813: PB1_14.MP 125.09,190.5 132.08,197.49 149.25,197.49 PORT_C_2.1 | SV2.2 121.03,223.52 121.92,222.63 121.92,210.19 | IC1.23 PB1_14.MP | 121.92,190.5 PB1_14.MP
  Bottom 1.422: 132.08,197.49 133.98,199.39 146.05,199.39 147.32,198.12 133.98,198.12
N$16  (1 unrouted)
  Top 0.813: SV3.2 127,223.52 127.64,222.88 127.58,215.85 125.09,213.36 124.46,213.36 119.38,213.36 114.94,208.92 114.3,208.92 | 113.03,208.92 111.12,208.92
  Top 1.422: 111.76,189.23 110.49,190.5 110.49,210.19 111.76,210.19 | 111.76,189.23 111.76,210.19 | 111.76,210.19 115.57,210.19 | 115.57,210.19 118.75,213.36 124.46,213.36 | 115.57,210.19 114.94,209.55 | 111.76,189.23 114.3,189.23 114.3,208.92 113.03,208.92 113.03,189.87 112.4,190.5 112.4,208.28
  Bottom 0.813: 149.41,202.63 133.98,202.62 124.46,193.04 PB1_13.MP IC1.24 | 149.41,202.63 147.95,202.56 PORT_C_2.2 149.54,202.56 149.41,202.63
  Bottom 1.422: SV3.2 126.37,223.52 128.27,225.43 128.27,227.33 | 128.27,227.33 127.64,227.33 127,227.97 127.64,228.6 128.27,228.6 128.91,227.97 128.27,227.33
N$17
  Top 1.422: 114.3,209.55 112.4,209.55
N$18
  Bottom 0.813: 144.26,212.84 139.69,212.84 | 139.69,212.84 137.79,210.82 134.62,210.82 122.56,198.12 PB1_11.MP IC1.26 | PORT_C_1.1 144.26,212.84 | 144.26,212.84 144.14,212.84 139.69,212.84
  Bottom 1.422: 138.43,210.82 146.05,210.82 147.95,212.73 139.7,212.73 137.79,210.82 139.06,210.82 140.33,212.09 142.24,212.09 144.14,212.09 146.05,212.09
N$19  (1 unrouted)
  Bottom 0.813: 140.97,217.99 140.33,217.17 139.06,215.9 135.89,212.73 133.35,212.73 131.44,210.82 121.92,200.66 IC1.27 | 140.97,217.99 PORT_C_1.2 | 140.97,217.99 149.44,218
  Bottom 1.422: 140.33,216.54 139.7,216.54 | 139.7,216.54 139.06,215.9 | 139.7,216.54 142.24,219.07 147.95,219.07 148.59,218.44 146.69,216.54 140.33,216.54 | 140.33,216.54 139.7,215.9 140.33,215.9 142.24,217.81 145.41,217.81 146.05,217.17
N$20
  Bottom 0.813: PORT_C_1.3 139.06,222.88 139.06,222.84 137.88,221.57 137.88,217.83 134.62,214.63 131.44,214.63 121.29,203.2 121.21,203.18 PB1_9.MP IC1.28 | IC1.28 76.33,203.2 76.33,203.45 76.84,203.45 IC1.28
N$21
  Bottom 0.813: JP2.1 78.74,205.74 121.21,205.72 126.37,213.36 129.54,216.54 133.35,216.54 135.89,219.07 135.89,224.79 135.89,226.06 137.79,227.97 140.45,228.09 PORT_C_1.4
  Bottom 1.422: 135.89,225.43 135.89,226.69 139.06,229.87 147.32,229.87 149.22,227.97 148.59,227.33 139.06,227.33 136.52,224.79 135.89,224.79 135.89,225.43 | 135.89,225.43 139.7,229.24 146.05,229.24 147.32,227.97 140.33,227.97 139.7,228.6
N$22
  Top 0.813: R1.1 62.86,215.9 | 62.86,215.9 66.68,215.9 66.68,218.44 62.86,218.44 62.86,217.81 | 62.86,217.81 62.86,216.54 | 64.77,216.54 66.04,216.54 66.04,217.81 62.86,217.81 | 62.86,217.81 63.5,217.17 65.41,217.17 64.77,216.54 | 64.77,216.54 62.86,216.54 | 62.86,216.54 62.86,215.9
  Bottom 0.813: R1.1 JP1.2
  Bottom 1.422: R1.1 62.86,208.92
N$23  (1 unrouted)
N$24  (1 unrouted)
N$25  (via drill 0.5 pad 2.18)
  Bottom 0.813: IC1.10 v55.24,180.34 47.62,172.72 SV6.2
N$26  (via drill 0.5 pad 2.18)
  Bottom 0.813: IC1.9 v52.7,182.88 SV5.2
  Bottom 1.422: SV5.2 45.09,180.34 46.35,180.34 | 46.35,180.34 47.62,180.34 50.16,182.88 v52.7,182.88 48.89,182.88 46.35,180.34
N$27  (via drill 0.5 pad 2.18)
  Bottom 0.813: 4.45,207.01 5.92,207.01 | 5.92,207.01 PORT_D_1.1 4.45,207.01 | 5.92,207.01 PB1_36.MP 20.96,207.01 27.31,200.66 IC1.2 | 4.45,207.01 3.17,207.01
  Bottom 1.422: 4.45,207.01 5.71,205.74 22.23,205.74 | 22.23,205.74 27.31,200.66 | 22.23,205.74 20.96,207.01 18.42,207.01 17.15,208.28 5.71,208.28 4.45,207.01 | 4.45,207.01 17.15,207.01 17.78,206.38
  other vias: 13.33,207.01
N$28  (via drill 0.5 pad 2.18)  (1 unrouted)
  Bottom 0.813: 20.96,201.93 v17.15,201.93 4.45,201.93 | 3.81,201.93 3.29,201.93 PORT_D_1.2 | IC1.3 26.04,198.12
  Bottom 1.422: 3.81,201.93 4.45,201.93 | 4.45,201.93 5.08,202.56 20.96,202.56 24.77,198.75 | 24.77,198.75 24.13,198.75 | 24.13,198.75 20.96,201.93 20.96,201.3 5.08,201.3 4.45,201.93 | 24.13,198.75 24.77,198.12 25.4,198.12 | 26.04,198.12 25.4,198.12 | 25.4,198.12 24.77,198.75
N$29  (via drill 0.5 pad 2.18)
  Top 1.422: 20.32,162.56 20.32,153.03 18.42,153.03 18.42,161.29 20.32,163.19 | 20.32,162.56 20.96,163.19 PB1_38.MP 21.59,196.22 22.23,196.85 22.23,198.12 | 22.23,198.12 21.59,198.12 | 21.59,198.12 19.69,198.12 19.69,196.22 20.32,195.58 20.32,163.19 | 20.32,163.19 20.32,162.56 | 20.32,162.56 19.69,161.93 19.69,153.67 | 21.59,198.12 21.59,196.85 23.5,196.85 23.5,198.12 22.23,198.12
  Bottom 0.813: 22.23,195.58 21.91,195.9 | 21.91,195.9 PB1_38.MP | PB1_38.MP 10.83,196.85 PORT_D_1.3 | PB1_38.MP 5.71,196.85 4.45,196.85 3.17,196.85 | IC1.4 22.86,195.58 22.23,195.58 | 22.23,195.58 21.91,195.58 21.91,195.9
  Bottom 1.422: 22.86,195.58 20.32,198.12 5.71,198.12 4.45,196.85 5.08,196.85 6.35,195.58 22.23,195.58 20.32,197.49 6.35,197.49 5.71,196.85 20.32,196.85 20.96,196.22
  other vias: 20.96,196.85
N$30  (via drill 0.5 pad 2.18)  (1 unrouted)
  Top 1.422: 24.13,193.68 25.4,192.41 v24.77,191.77
  Bottom 0.813: PORT_D_1.4 4.49,191.77 v24.77,191.77 26.04,193.04 IC1.5
N$31  (via drill 0.5 pad 2.18)
  Bottom 0.813: PORT_D_1.5 4.57,186.69 PB1_39.MP 29.21,187.32 32.38,190.5 IC1.6
  Bottom 1.422: 4.45,187.32 29.21,187.32 27.94,186.06 5.08,186.06 4.45,186.69
  other vias: 28.58,186.69
N$32  (1 unrouted)
N$33
  Bottom 0.813: 38.73,173.99 Q1.1 C4.1
  Bottom 1.422: SV6.1 38.73,173.99 36.83,172.09 36.83,170.81 | 36.83,167.64 39.37,167.64 40,168.28 40,173.36 39.37,173.36 36.83,170.81 | 36.83,170.81 36.83,168.91 39.37,168.91 38.73,169.55 38.73,172.09 38.1,171.45 38.1,169.55
N$34
  Bottom 0.813: SV5.3 C3.1 36.2,177.17 Q1.2
  Bottom 1.422: 36.2,177.17 37.46,178.44 40,178.44 40,181.61 39.37,180.98 36.83,180.98 36.83,179.07 37.46,179.71 39.37,179.71 37.46,181.61 C3.1 36.2,182.25 36.83,182.88 SV5.3
N$35
  Bottom 0.813: SV6.3 47.62,168.91 51.43,172.72 52.7,173.99 54.61,173.99 LSP10.MP
  Bottom 1.422: 53.34,174.62 53.98,175.26 55.24,176.53 55.88,176.53 55.88,173.99 54.61,173.99 55.24,174.62 55.24,175.9 52.07,172.72 51.43,172.72 53.34,174.62
N$36
  Bottom 0.813: SV5.1 PB6_IO_1.MP
N$37  (via drill 0.5 pad 2.18)  (1 unrouted)
  Bottom 0.813: 53.34,170.81 46.35,163.83 PB1_40.MP 29.85,163.83 29.21,164.47 26.67,167 26.67,177.8 | 53.98,171.45 59.05,171.45 | 26.67,181.61 26.04,181.61 5.71,181.61 4.64,181.61 PORT_D_1.6
  Bottom 1.422: 6.35,182.25 6.98,182.88 25.4,182.88 26.04,182.25 | 26.04,181.61 26.04,182.25 | 26.04,182.25 26.67,181.61 | 26.67,177.8 26.67,166.37 29.21,163.83 | 26.67,177.8 26.67,181.61 | 26.67,181.61 26.04,180.98 26.04,180.34 25.4,180.98 23.5,180.98 | 23.5,180.98 6.35,180.98 5.71,181.61 6.35,182.25 | 6.35,182.25 24.77,182.25 23.5,180.98 | 23.5,180.98 26.67,177.8 | IC1.11 60.32,177.8 59.05,176.53 59.05,171.45 58.42,170.81 53.34,170.81 | 53.34,170.81 53.98,171.45 | 29.21,164.47 46.99,164.47 53.34,170.81
  other vias: 34.29,163.83
N$38  (via drill 0.5 pad 2.18)
  Bottom 0.813: PORT_D_2.1 23.54,176.49 23.54,166.33 28.58,161.29 38.73,161.29 PB1_41.MP 47.62,161.29 53.98,167.64 61.59,167.64 61.59,168.91 | 68.58,175.26 IC1.12
  Bottom 1.422: 52.07,165.1 60.32,165.1 61.59,166.37 61.59,168.91 | 61.59,168.91 61.59,173.99 62.86,175.26 68.58,175.26 | 60.96,167 59.69,167 | 59.69,167 54.61,167 53.98,166.37 | 53.34,165.74 53.98,166.37 | 53.98,166.37 60.32,166.37 | 61.59,168.91 59.69,167 | 38.73,161.29 27.94,161.29 23.5,165.74 23.5,173.99 | 23.5,173.99 23.5,176.53 | 23.5,176.53 4.45,176.53 | 4.45,175.9 5.08,175.26 22.23,175.26 23.5,173.99 | 23.5,176.53 22.23,177.8 5.08,177.8 3.81,176.53
  other vias: 39.37,161.29
N$39
  Bottom 0.813: 66.04,172.72 65.41,172.72 64.14,171.45 64.14,170.81 | 61.59,162.56 52.7,162.56 48.89,158.75 | 46.99,158.75 PB1_42.MP 27.31,158.75 | 20.96,171.45 4.49,171.45 | 4.49,171.45 PORT_D_2.2 4.45,171.45 4.49,171.45
  Bottom 1.422: 27.94,158.12 46.35,158.12 46.99,158.75 48.26,158.75 | 48.26,158.75 48.89,158.75 52.07,161.93 52.07,162.56 | 52.07,162.56 61.59,162.56 64.14,165.1 64.14,170.81 66.04,172.72 IC1.13 | 52.07,162.56 48.26,158.75 | 27.31,158.75 20.96,165.1 20.96,171.45 4.45,171.45 | 38.73,147.32 38.73,149.22 37.46,147.96 37.46,146.05 | 38.73,145.42 38.73,147.32 | 38.73,147.32 42.54,151.13 42.54,147.32 | 42.54,144.78 42.54,147.32 | 42.54,147.32 41.27,148.59 40.64,148.59 38.73,150.5 | 38.73,150.5 39.37,150.5 42.54,153.67 | 42.54,147.32 41.27,146.05 40.64,146.05 | 40.64,146.05 40,146.69 40,147.32 40.64,147.96 | 40.64,147.96 40.64,146.05 | 40.64,147.96 40.64,151.13 42.54,153.03 42.54,154.31 42.54,156.84 PB1_42.MP 44.45,157.48 43.18,156.21 43.18,142.24 | 43.18,140.34 43.18,139.7 43.81,139.06 43.81,156.21 | 40.64,143.51 40.64,142.88 43.18,140.34 | 43.18,140.34 43.18,142.24 | 43.18,142.24 41.91,143.51 | 38.73,144.15 36.2,146.69 36.2,148.59 36.83,148.59 38.73,150.5
  Bottom 1.676: 42.54,154.31 42.54,153.67 42.54,153.03 42.54,151.13 42.54,149.22 38.73,149.22 38.73,150.5 41.27,150.5 41.27,151.77 40.64,151.13 40,151.13 | 41.91,144.15 42.54,143.51 41.91,143.51 40.64,143.51 39.37,143.51 38.73,144.15 38.73,145.42 42.54,145.42 42.54,144.78 42.54,144.15 41.91,144.15 | 41.91,144.15 40,144.15
N$40  (1 unrouted)
  Bottom 0.813: PORT_B_1.4 127.59,177.17 127,177.8 SV8.5 IC1.18 | X1.9 84.45,142.24 86.36,144.15 86.36,163.96 94.62,163.83 LSP17.MP
N$41  (via drill 0.5 pad 2.18)
  Top 0.813: v64.14,153.67 v76.84,153.67 | v90.81,167 v90.81,175.26
  Bottom 0.813: PORT_B_1.5 124.34,172.21 121.29,175.26 PB1_5.MP v90.81,175.26 SV8.4 IC1.17 77.34,175.26 | X1.1 64.14,142.24 v64.14,153.67 | v76.84,153.67 76.84,158.75 84.45,158.75 84.45,167 90.17,167 v90.81,167
  Bottom 1.422: v90.81,167 90.17,166.37 91.44,166.37 91.44,167.64 90.17,167.64 90.17,167
N$42
  Bottom 0.813: PORT_B_1.6 134.42,167 125.73,167 120.02,172.72 PB1_6.MP SV8.3 IC1.16
N$43  (via drill 0.5 pad 2.18)  (1 unrouted)
  Bottom 0.813: 118.75,170.18 PB1_7.MP SV8.2 IC1.15 | PORT_B_2.1 137.16,156.84 128.86,156.88 123.83,161.29 90.81,161.29 v89.54,161.29
  Bottom 1.422: 90.81,161.29 90.17,161.93 88.9,161.93 88.27,161.29 88.27,160.02 90.17,160.02 90.81,160.66 90.81,161.29
N$44  (2 unrouted)
  Bottom 0.813: PB1_8.MP 118.75,170.18 127,161.93 140.29,161.93 PORT_B_2.2 | SV8.1 80.01,167.64 | 80.01,167 80.01,163.19
  Bottom 1.422: 81.92,167 81.28,167 | 80.65,167 80.01,167 80.01,167.64 81.92,167.64 81.92,166.37 81.28,167 | 81.28,167 80.65,167 | 80.65,167 80.65,166.37 81.28,166.37
N$45  (1 unrouted)
N$46
  Bottom 0.813: JP27.1 IC1.21
N$47
  Bottom 0.813: JP4.1 R9.2
  Bottom 1.422: 94.62,137.16 94.62,135.25 | 94.62,135.25 R9.2 | R9.2 95.25,134.62 95.89,135.25 95.89,137.8 JP4.1 | R9.2 92.08,134.62 94.62,137.16 | 94.62,137.8 94.62,137.16 | 94.62,135.25 93.98,135.25
N$48
  Bottom 0.813: R10.2 JP5.1
N$49
  Bottom 0.813: JP6.1 R11.2
N$50
  Bottom 0.813: R12.2 JP7.1
N$51
  Top 0.813: PB1_16.MP 90.81,203.2
  Bottom 0.813: JP13.1 PB1_16.MP
  Bottom 1.422: 90.17,208.28 90.17,214.63 JP13.1 91.44,214.63 91.44,208.28 90.17,208.28
N$52
  Bottom 0.813: JP9.1 R14.2
N$53
  Bottom 0.813: R15.2 JP11.1
N$54
  Bottom 0.813: R16.2 JP10.1
N$55
  Bottom 0.813: LED9.A R2.2
  Bottom 1.422: 79.38,225.43 79.38,226.06 81.92,228.6 LED9.A 82.55,227.97 80.01,225.43
N$56
  Top 0.813: PB1_17.MP 95.89,200.66
  Bottom 0.813: JP14.1 PB1_17.MP
  Bottom 1.422: 95.25,208.28 96.52,208.28 96.52,214.63 JP14.1 95.25,214.63 95.25,208.28
N$57
  Bottom 1.422: 111.76,214.63 111.76,208.28 110.49,208.28 110.49,214.63 111.76,214.63
N$58
  Top 0.813: PB1_18.MP 100.97,198.12
  Bottom 0.813: JP15.1 PB1_18.MP
N$59
  Bottom 0.813: R7.1 JP17.2
  Bottom 1.422: 110.49,217.17 110.49,219.71 111.76,219.71 111.76,217.17 JP17.2
N$60
  Top 0.813: PB1_20.MP 111.12,193.04
  Bottom 0.813: JP17.1 PB1_20.MP
N$61
  Top 0.813: PB1_21.MP 119.38,190.5
  Bottom 0.813: JP18.1 115.57,208.92 PB1_21.MP
N$62
  Bottom 0.813: JP12.2 R2.1
  Bottom 1.422: 84.45,217.17 84.45,219.71 85.73,219.71 85.73,217.17 JP12.2
N$63
  Bottom 1.422: 87,228.6 87,227.97 84.45,225.43 85.73,225.43 85.73,226.06 88.27,228.6 87,228.6
N$64
  Bottom 1.422: 93.34,228.6 92.08,228.6 92.08,227.97 89.54,225.43 90.81,225.43 90.81,226.06 93.34,228.6
N$65
  Bottom 0.813: R4.1 JP14.2
  Bottom 1.422: 95.25,217.17 95.25,219.71 96.52,219.71 96.52,217.17 JP14.2
N$66
  Bottom 0.813: R6.1 JP16.2
N$67
  Bottom 0.813: JP13.2 R3.1
  Bottom 1.422: 91.44,217.17 91.44,219.71 90.17,219.71 90.17,217.17 JP13.2
N$68
  Bottom 0.813: R8.1 JP18.2
N$69
  Bottom 0.813: R9.1 LED1.A
N$70
  Bottom 0.813: R10.1 LED2.A
N$71
  Bottom 0.813: LED3.A R11.1
N$72
  Bottom 0.813: R12.1 LED4.A
N$73
  Bottom 0.813: R13.1 LED5.A
N$74
  Bottom 0.813: R16.1 LED7.A
N$75
  Bottom 0.813: R14.1 LED6.A
N$76
  Bottom 0.813: R15.1 LED8.A
N$77
  Bottom 1.422: 113.67,228.6 112.4,228.6 112.4,227.33 110.49,225.43 111.76,225.43 111.76,226.69 113.67,228.6
N$78
  Bottom 0.813: LED10.A R3.2
N$79
  Bottom 0.813: LED11.A R4.2
N$80
  Bottom 0.813: LED12.A R5.2
  Bottom 1.422: LED12.A 97.16,228.6 97.16,227.97 94.62,225.43 95.89,225.43 95.89,226.06 98.43,228.6 LED12.A
N$81
  Bottom 0.813: LED13.A R6.2
N$82
  Bottom 0.813: LED14.A R7.2
  Bottom 1.422: LED14.A 107.32,228.6 107.32,227.33 105.41,225.43 106.68,225.43 106.68,226.69 108.59,228.6 LED14.A
N$83
  Bottom 0.813: R8.2 LED15.A
N$84
  Bottom 0.813: PB2_9.MP JP4.2
N$85
  Top 0.813: PB2_10.MP 99.7,170.18
  Bottom 0.813: JP5.2 99.7,140.97 PB2_10.MP
  Bottom 1.422: 100.33,140.34 100.33,144.15 100.33,144.78 | 100.33,144.78 99.06,144.78 | 99.06,144.78 99.06,140.34 99.7,140.97 | 99.06,144.78 99.06,146.05 100.33,146.05 100.33,144.78
N$86
  Top 1.422: 77.47,154.31 77.47,151.77 63.5,151.77 63.5,154.31 77.47,154.31 | 77.47,154.31 76.84,153.67 76.84,153.03 64.14,153.03
N$87
  Top 0.813: PB2_12.MP 109.86,175.26
  Bottom 0.813: JP7.2 109.86,140.97
  Bottom 1.422: 109.86,140.97 PB2_12.MP
N$88
  Top 0.813: PB2_13.MP 114.94,145.42 114.94,177.8 113.67,178.44 107.32,178.44 97.79,178.44 94.62,175.9 94.62,166.37
  Top 1.422: 107.32,178.44 97.16,178.44 94.62,175.9 93.98,175.26 93.98,164.47 95.89,162.56 95.89,172.09 | 107.32,178.44 115.57,178.44 116.2,177.8 116.2,147.32 | 116.2,147.32 116.2,146.69 | 116.2,146.69 114.94,145.42 114.94,176.53 115.57,177.17 114.3,177.17 | 113.67,177.8 114.3,177.17 | 114.3,177.17 114.3,143.51 116.2,143.51 116.2,146.69 | 116.2,147.32 115.57,146.69 115.57,144.15 | 95.89,172.09 95.89,175.9 95.25,175.9 95.25,163.83 | 95.89,172.09 97.79,173.99 100.97,173.99 100.97,175.26 102.23,176.53 106.05,176.53 106.05,177.17 | 107.32,178.44 106.05,177.17 | 106.05,177.17 96.52,177.17 96.52,175.9 | 96.52,175.9 96.52,173.99 97.79,175.26 | 97.79,175.26 98.43,175.9 | 98.43,175.9 100.97,175.9 100.33,175.26 97.79,175.26 | 97.79,175.26 97.16,175.9 97.16,176.53 | 99.06,176.53 98.43,175.9 | 98.43,175.9 96.52,175.9
  Bottom 1.422: JP8.2 PB2_13.MP | 114.3,144.78 114.94,144.15 JP8.2 | JP8.2 114.3,140.97 114.3,144.78 | 114.3,144.78 115.57,144.78 | 115.57,144.78 115.57,140.97 | 114.3,144.78 114.3,146.05 115.57,146.05 115.57,144.78
N$89
  Top 0.813: PB2_14.MP 120.02,180.34
  Bottom 1.422: PB2_14.MP JP9.2 120.65,140.34 120.65,146.05 119.38,146.05 119.38,140.34
N$90  (via drill 0.5 pad 2.18)
  Top 0.813: v48.89,153.67 48.89,177.8
  Bottom 0.813: PB2_15.MP 125.09,148.59 92.08,148.59 | 92.08,138.43 92.08,138.18 84.71,130.81 84.45,130.81 55.88,130.81 | 53.98,130.81 48.89,135.89 v48.89,153.67 | JP10.2 125.09,140.97
  Bottom 1.422: 48.26,154.31 48.26,136.53 53.98,130.81 54.61,130.81 | 54.61,130.81 54.61,132.08 | 54.61,132.08 54.61,132.72 | 54.61,132.72 51.43,135.89 51.43,154.94 48.26,154.94 49.53,153.67 50.16,153.67 50.16,136.53 53.98,132.72 53.98,132.08 49.53,136.53 49.53,153.03 | 54.61,132.08 55.24,131.44 | 55.24,131.44 55.88,130.81 54.61,130.81 | 125.09,140.97 PB2_15.MP | 124.46,140.34 124.46,144.78 | 124.46,144.78 125.73,144.78 | 125.73,144.78 125.73,140.34 JP10.2 | 124.46,144.78 124.46,147.96 125.73,147.96 | 125.73,147.96 125.73,144.78 | 125.73,147.96 125.73,148.59 92.08,148.59 92.08,138.43 85.09,131.44 | 85.09,131.44 84.45,130.81 83.82,131.44 | 83.82,131.44 55.88,131.44 | 55.24,131.44 55.88,131.44 | 55.88,131.44 54.61,132.72 | 83.82,131.44 85.09,131.44
N$91
  Bottom 1.422: 80.65,142.88 81.28,143.51 81.28,147.32 81.92,147.96 83.82,147.96 | 85.09,147.96 83.82,147.96 | 83.82,147.96 85.73,149.86 | 85.73,149.86 85.73,151.13 | 85.73,149.86 85.73,144.15 84.45,142.88 81.92,142.88 82.55,143.51 82.55,144.15 | 82.55,144.15 82.55,147.32 83.19,146.69 84.45,146.69 84.45,143.51 83.82,144.15 82.55,144.15 | 82.55,144.15 83.19,144.78 83.19,146.05
N$92  (1 unrouted)
N$93  (1 unrouted)
N$94  (1 unrouted)
N$95  (1 unrouted)
N$96  (1 unrouted)
N$97  (1 unrouted)
N$98  (1 unrouted)
N$99  (1 unrouted)
N$100
  Bottom 0.813: JP19.1 R17.2
  Bottom 1.422: 10.79,133.35 10.79,135.25 JP19.1 9.53,133.99 10.16,133.35
N$101
  Bottom 0.813: R18.2 JP20.1
  Bottom 1.422: JP20.1 14.61,133.99 15.88,132.72 15.88,135.25 JP20.1
N$102
  Bottom 0.813: JP21.1 R19.2
  Bottom 1.422: JP21.1 19.69,133.35 20.32,132.72 20.96,132.72 20.96,135.25 JP21.1
N$103
  Bottom 1.422: 133.98,202.56 136.52,205.11 146.05,205.11 147.95,203.2 135.89,203.2 135.89,203.84 136.52,204.47 146.05,204.47 146.69,203.84
N$104
  Bottom 0.813: JP23.1 R21.2
  Bottom 1.422: 31.12,132.72 31.12,135.25 JP23.1 29.85,133.99 31.12,132.72
N$105
  Bottom 0.813: JP24.1 R22.2
  Bottom 1.422: 36.2,132.72 36.2,133.35 | 36.2,133.35 36.2,134.62 JP24.1 33.66,136.53 33.66,135.89 36.2,133.35
N$106
  Top 1.422: 61.59,158.12 62.86,158.12 63.5,157.48 63.5,187.32 64.14,187.96 63.5,187.96 | 62.23,187.96 61.59,187.96 | 61.59,187.96 61.59,158.75 | 61.59,158.75 62.86,157.48 62.86,165.1 | 62.86,167.64 62.86,187.32 62.23,187.96 | 62.23,187.96 63.5,187.96 | 63.5,187.96 64.14,187.32 64.14,157.48 63.5,156.84 62.23,156.84 61.59,157.48 61.59,158.75 | 61.59,187.96 61.59,189.23 62.86,191.13 65.41,191.13 66.04,190.5 66.04,168.28 62.86,165.1 | 62.86,165.1 62.86,167.64 | 62.86,167.64 64.77,169.55 64.77,168.91
N$107
  Bottom 0.813: JP25.1 R24.2
  Bottom 1.422: 38.73,136.53 38.73,135.89 41.27,133.35 | 41.27,133.35 41.27,132.72 | 41.27,133.35 41.27,134.62 40,135.89 JP25.1
N$108
  Bottom 0.813: R17.1 LED16.A
N$109
  Bottom 0.813: R18.1 LED17.A
N$110
  Bottom 0.813: LED18.A R19.1
N$111
  Bottom 0.813: R20.1 LED19.A
N$112
  Bottom 0.813: R21.1 LED20.A
N$113
  Bottom 0.813: R24.1 LED22.A
N$114
  Bottom 0.813: R22.1 LED21.A
N$115
  Bottom 0.813: R23.1 LED23.A
N$116
  Bottom 1.422: 138.43,219.07 138.43,218.44 | 138.43,218.44 137.79,217.81 137.79,220.34 | 138.43,218.44 142.88,222.88 148.59,222.88 148.59,223.52 147.95,224.16 139.7,224.16 137.79,222.25 137.79,220.34 | 137.79,220.34 140.97,223.52 142.24,223.52 | 142.88,223.52 142.24,223.52 | 142.24,223.52 138.43,219.71
N$117
  Top 0.813: PB1_48.MP 13.97,161.93 17.15,165.1 17.15,165.74 | 17.15,167.64 17.15,195.58 17.15,201.3 17.15,201.93
  Top 1.422: 13.33,161.29 13.33,160.02 13.33,153.67 14.61,153.67 14.61,161.29 | 13.33,161.29 14.61,161.29 | 14.61,161.29 17.15,163.83 17.15,165.74 | 17.15,168.91 17.15,195.58 16.51,196.22 | 16.51,196.22 16.51,200.66 | 16.51,200.66 16.51,203.2 17.78,203.2 17.78,201.93 17.15,201.3 16.51,200.66 | 16.51,196.22 16.51,169.55 17.15,168.91 | 17.15,168.91 17.15,167.64 17.15,165.74 | 17.15,165.74 13.33,161.93 13.33,161.29
  Bottom 0.813: PB1_48.MP 13.97,153.67 20.96,150.5 SV9.7 20.96,144.78 14.61,140.97 JP20.2
N$118
  Top 0.813: PB1_47.MP 19.05,161.93 20.96,163.83 20.96,196.85
  Bottom 0.813: PB1_47.MP 19.05,154.31 23.5,151.13 SV9.6 23.5,143.51 19.69,140.97 JP21.2
N$119
  Top 0.813: PB1_46.MP 24.13,160.66 24.77,161.29 24.77,191.77
  Bottom 0.813: JP22.2 24.77,140.34 26.04,141.61 26.04,146.05 SV9.5 26.04,151.77 24.13,153.67 PB1_46.MP
N$120
  Top 0.813: 833.12,-72.39 825.5,-73.91 825.5,-76.2 821.69,-76.2
  Top 1.422: 833.12,-74.93 833.12,-76.2 831.85,-77.47 822.33,-77.47 821.69,-76.84 821.69,-74.29 823.6,-72.39 833.12,-72.39 833.12,-74.93 | 833.12,-74.93 831.85,-76.2 822.96,-76.2 822.33,-76.84 822.33,-74.93 824.23,-73.03 831.22,-73.03 831.85,-73.66 | 831.85,-73.66 831.85,-73.03 | 831.85,-73.66 831.85,-74.93 822.96,-74.93 824.23,-73.66 831.22,-73.66
N$121
  Top 0.813: PB1_45.MP 34.29,163.83
  Bottom 0.813: PB1_45.MP 34.29,154.31 31.12,151.13 SV9.3 31.12,143.51 34.29,140.34 JP24.2
N$122  (2 unrouted)
  Top 0.813: PB1_44.MP 39.37,160.66
  Bottom 0.813: PB1_44.MP 39.37,153.03 33.66,150.5 SV9.2 33.66,144.15 39.37,140.97 JP25.2
N$123
  Bottom 0.813: JP26.2 44.45,147.32 | 44.45,147.32 PB1_43.MP | SV9.1 44.45,147.32
N$124  (1 unrouted)
N$125  (1 unrouted)
N$126  (1 unrouted)
N$127  (1 unrouted)
N$128  (1 unrouted)
N$129  (1 unrouted)
N$130  (1 unrouted)
N$131
  Bottom 1.422: 93.98,165.74 95.89,165.74 95.89,167 93.98,167 93.98,165.74
N$132
  Bottom 1.676: 5.84,166.88 6.35,141.1 4.83,140.59 5.08,130.68 8,130.68 11.81,126.87 11.81,122.17 6.86,122.17 8.26,129.41 10.92,125.22 10.67,122.94 7.49,123.19 9.14,126.87 9.4,123.7
N$133  (via drill 0.5 pad 2.18)
  other vias: 66.68,207.01
N$134
  Bottom 1.676: 17.15,167.64 11.43,161.93 11.43,158.12 23.5,158.12 18.42,163.19 18.42,168.91 16.51,168.91 16.51,163.83 12.7,160.02 12.7,158.75 13.33,159.38 20.96,159.38 17.15,163.19 17.15,166.37 12.7,161.93 12.7,160.66 19.05,160.66 17.78,161.93 15.88,161.93
N$135  (via drill 0.5 pad 2.18)
  other vias: 20.96,220.34
N$136  (via drill 0.5 pad 2.18)
  other vias: 61.47,187.71
N$137
  Bottom 0.813: X9.1 4.42,221 4.45,222.25 X9.2 X9.3
N$138  (via drill 0.5 pad 2.18)
  Top 1.422: v124.46,216.54 v119.38,216.54
N$139  (via drill 0.5 pad 2.18)  (1 unrouted)
  Top 0.813: v81.92,151.13 83.19,151.13 85.73,148.59 85.73,128.27 | 85.73,127.64 v85.73,127.25 | 40.64,209.55 37.46,206.38 v31.75,206.38 v27.31,206.38 26.67,205.74 26.67,201.93 | 44.45,222.25 62.86,222.25 | 62.86,222.25 66.04,222.25 | 66.04,222.25 66.68,222.25 | 62.86,222.25 62.86,220.98 | 66.04,222.25 66.04,221.62 63.5,221.62 | 33.66,186.69 33.66,190.5 26.67,197.49 26.67,198.12 | v34.29,185.42 34.29,186.06 | 34.29,186.06 33.66,186.69 | 33.66,186.69 33.66,185.42 34.29,184.79 | 34.92,184.79 34.92,186.06 34.29,186.06
  Top 1.422: 88.27,130.18 130.81,130.18 130.81,131.44 93.34,131.44 | 85.73,127 84.45,127 | 84.45,127 84.45,147.96 | 84.45,147.96 85.09,148.59 80.65,148.59 80.01,149.22 80.01,153.67 80.65,154.31 84.45,154.31 86.36,152.4 86.36,149.86 | 86.36,149.86 86.36,130.18 | 86.36,130.18 86.36,128.27 | 86.36,128.27 86.36,126.37 | 86.36,126.37 84.45,126.37 84.45,127 | 84.45,147.96 84.45,153.03 85.73,151.77 85.73,147.96 | 85.73,127.64 85.73,128.27 | 85.73,128.27 85.73,147.96 | 85.73,147.96 83.82,149.86 80.65,149.86 80.65,153.03 83.19,153.03 83.82,153.67 83.82,151.13 81.28,151.13 81.28,152.4 82.55,152.4 83.19,151.77 | 85.73,128.27 88.27,130.81 91.44,130.81 91.44,131.44 | 91.44,131.44 91.44,144.78 87.63,148.59 | 86.36,149.86 87.63,148.59 | 87.63,148.59 87.63,146.69 | 87.63,146.69 87.63,145.42 88.27,144.78 90.17,144.78 88.27,146.69 87.63,146.69 | 33.66,184.79 34.29,184.79 34.92,184.79 | 34.92,184.79 34.92,190.5 | 34.92,190.5 33.02,192.41 | 33.02,192.41 31.75,193.68 | 31.75,193.68 29.21,196.22 | 29.21,196.22 28.58,196.22 27.94,196.85 | 27.94,196.85 26.67,196.85 | 26.67,196.85 33.66,189.87 33.66,184.79 | 33.66,184.79 v34.29,185.42 | 26.67,196.85 26.67,198.12 | 26.67,198.12 26.67,201.93 | 26.67,203.84 26.67,207.01 38.1,207.01 40.64,209.55 | 40.64,209.55 40.64,219.07 | 40.64,219.07 40.64,220.98 | 40.64,220.98 41.91,222.25 43.18,222.25 | 43.18,222.25 43.81,222.25 | 43.81,222.25 44.45,222.25 | 44.45,222.25 66.68,222.25 66.68,220.98 62.86,220.98 | 62.86,220.98 62.23,221.62 45.09,221.62 41.91,218.44 | 41.91,218.44 41.27,217.81 41.27,220.34 41.91,220.98 42.54,220.98 43.81,222.25 | 43.81,222.25 43.81,221.62 41.91,219.71 | 28.58,203.84 29.21,204.47 40,204.47 40.64,205.11 40.64,209.55
  Top 1.422: 28.58,203.84 26.67,201.93 | 26.67,201.93 26.67,203.84 | 26.67,203.84 28.58,205.74 38.73,205.74 39.37,205.11 39.37,206.38 40,207.01 38.73,207.01 38.1,206.38 | 27.94,196.85 26.67,198.12 | 33.02,192.41 50.8,192.41 53.98,195.58 55.88,195.58 | 55.88,195.58 55.88,192.41 | 55.88,192.41 55.88,191.77 | 55.88,191.77 54.61,191.77 | 54.61,191.77 48.26,191.77 | 48.26,191.77 38.73,191.77 | 38.73,191.77 35.56,191.77 34.92,191.13 34.92,190.5 | 28.58,203.84 55.88,203.84 54.61,205.11 46.99,205.11 44.45,207.65 41.27,207.65 41.27,205.11 45.72,205.11 | 46.35,205.11 45.72,205.11 | 45.72,205.11 43.81,207.01 42.54,207.01 | 42.54,207.01 41.91,206.38 43.81,206.38 44.45,205.74 | 42.54,207.01 42.54,207.65 40.64,209.55 | 41.91,218.44 45.72,218.44 46.99,217.17 | 46.99,217.17 47.62,216.54 | 47.62,216.54 52.07,216.54 | 52.07,216.54 53.98,214.63 53.98,212.09 54.61,211.46 59.05,211.46 59.69,212.09 59.69,219.71 | 59.69,219.71 59.69,220.98 48.26,220.98 | 48.26,220.98 45.09,220.98 43.81,219.71 59.05,219.71 59.05,213.36 58.42,212.73 54.61,212.73 54.61,214.63 53.98,215.26 57.78,215.26 57.78,213.36 55.88,213.36 55.24,214 55.88,214 56.52,214.63 57.15,214.63 58.42,215.9 53.98,215.9 53.34,216.54 52.7,216.54 50.8,218.44 | 50.8,218.44 46.99,218.44 | 46.99,218.44 46.35,219.07 | 46.99,218.44 48.26,217.17 49.53,217.17 | 55.24,217.17 57.15,217.17 57.78,216.54 57.78,219.07 51.43,219.07 | 50.8,219.07 51.43,219.07 | 51.43,219.07 52.7,217.81 56.52,217.81 57.15,218.44 50.8,218.44 | 50.8,218.44 48.26,220.98 | 46.99,217.17 46.99,215.9 | 46.99,215.9 46.99,214.63 | 46.99,211.46 46.99,214.63 | 46.99,214.63 49.53,217.17 | 49.53,217.17 55.24,217.17
  Top 1.422: 55.24,217.17 54.61,216.54 53.98,216.54 | 53.98,216.54 52.07,216.54 | 47.62,216.54 46.99,215.9 | 46.99,215.9 53.34,215.9 53.98,216.54 | 86.36,130.18 87.63,131.44 | 91.44,131.44 93.34,131.44 | 93.34,131.44 90.81,133.99 | 48.26,191.77 48.89,191.13 | 48.89,191.13 49.53,190.5 49.53,186.06 | 49.53,186.06 49.53,184.79 | 49.53,184.79 49.53,181.61 47.62,181.61 47.62,184.15 48.89,185.42 | 49.53,184.79 50.8,186.06 | 50.8,186.06 55.88,186.06 55.88,191.77 | 55.88,192.41 53.98,190.5 50.16,190.5 50.8,189.87 50.8,187.32 | 50.8,187.32 50.8,186.06 | 50.8,186.06 51.43,186.69 52.7,186.69 | 52.7,186.69 55.24,186.69 54.61,187.32 54.61,191.77 | 54.61,191.77 52.07,189.23 51.43,189.23 52.07,188.59 52.07,187.96 52.7,187.96 53.34,188.59 53.34,189.87 53.98,189.23 53.98,187.96 52.7,186.69 | 49.53,186.06 48.89,185.42 | 48.89,185.42 48.89,182.25 | 34.92,184.79 36.2,184.79 | 36.2,184.79 36.2,189.87 37.46,191.13 38.1,191.13 | 38.1,191.13 37.46,190.5 | 37.46,190.5 35.56,190.5 | 37.46,190.5 36.83,189.87 | 36.83,189.87 35.56,188.59 | 43.18,222.25 43.18,223.52 | 43.18,223.52 43.18,225.43 40.64,225.43 40,224.79 40,219.71 40.64,219.07 | 40.64,220.98 40.64,223.52 41.91,224.79 41.91,224.16 42.54,223.52 41.91,222.88 | 43.18,223.52 44.45,222.25 | 62.86,220.98 60.96,220.98 | 60.32,220.98 60.96,220.98 | 60.96,220.98 59.69,219.71 | 38.1,191.13 38.73,191.77 | 36.83,189.87 36.83,184.79 | 36.83,184.79 36.2,184.79 | 36.83,184.79 37.46,184.79 37.46,189.87 | 48.89,191.13 48.89,185.42 | 50.8,187.32 52.07,187.32 | 31.75,193.68 31.75,196.22 29.21,196.22 | 29.21,196.22 30.48,195.58 | 52.7,194.94 52.7,196.22 55.88,196.22 55.88,195.58 | 86.36,126.37 87,126.37 87,130.18 88.27,130.18
  Top 1.422: 88.27,130.18 86.36,128.27
  Bottom 0.813: C4.2 33.02,167.64 32.38,167.64 29.85,168.91 | 29.85,179.71 29.85,180.34 32.38,181.61 C3.2 33.66,184.15 34.92,185.42 | 73.03,186.69 71.76,185.42 IC1.8 34.92,185.42 | 73.03,186.69 74.3,187.96 IC1.22 | X1.6 73.03,145.42 73.03,149.86 73.03,152.4 73.03,153.03 73.03,154.31 | 73.03,156.21 73.03,163.19 73.03,165.1 73.03,166.37 73.03,167.64 73.03,186.69 | X1.6 X1.8 X1.10 78.11,149.86 79.38,151.13 81.28,151.13 v81.92,151.13 | X1.4 X1.6 | LED8.K LED7.K LED6.K LED5.K LED4.K LED3.K LED2.K LED1.K 88.27,122.56 v85.73,127.25 83.19,122.56 LED23.K LED22.K LED21.K LED20.K LED19.K LED18.K LED17.K LED16.K | 15.88,217.17 C1.2 33.66,216.54 | 15.88,217.17 15.88,217.13 DC_IN.2 15.88,217.17 | 33.66,216.54 33.66,214.63 IC2.GND 33.66,208.28 v31.75,206.38 30.48,206.38 v27.31,206.38 | C2.2 33.66,216.54 | 4.41,217.09 5.63,217.09 15.88,217.17 | 4.45,222.19 4.45,227.33 8.26,231.14 12.7,231.14 LED9.K LED10.K LED11.K LED12.K LED13.K LED14.K LED15.K 118.11,231.14 119.38,231.14 | 119.38,230.5 119.38,231.14 | 124.46,229.24 123.19,231.14 | 123.19,231.14 122.56,231.14 119.38,231.14 | SV4.3 132.08,229.24 132.08,229.87 131.44,230.5 130.81,231.14 123.19,231.14 | 34.92,185.42 v34.29,185.42